# Altium PCB AB32VG1_Prougen_Circuit_V02.PcbDoc (part 3 of 3)
Units mm, origin at the board's own origin, x right, y up, seen from the top; angles counter-clockwise.
Board outline 90.13 x 60.13 mm, 4 copper layers (Top Layer, GND, POWER, Bottom Layer); 102 components, 91 nets, 357 pads, 386 vias.
Unrouted connection lines stored in the file: 1.
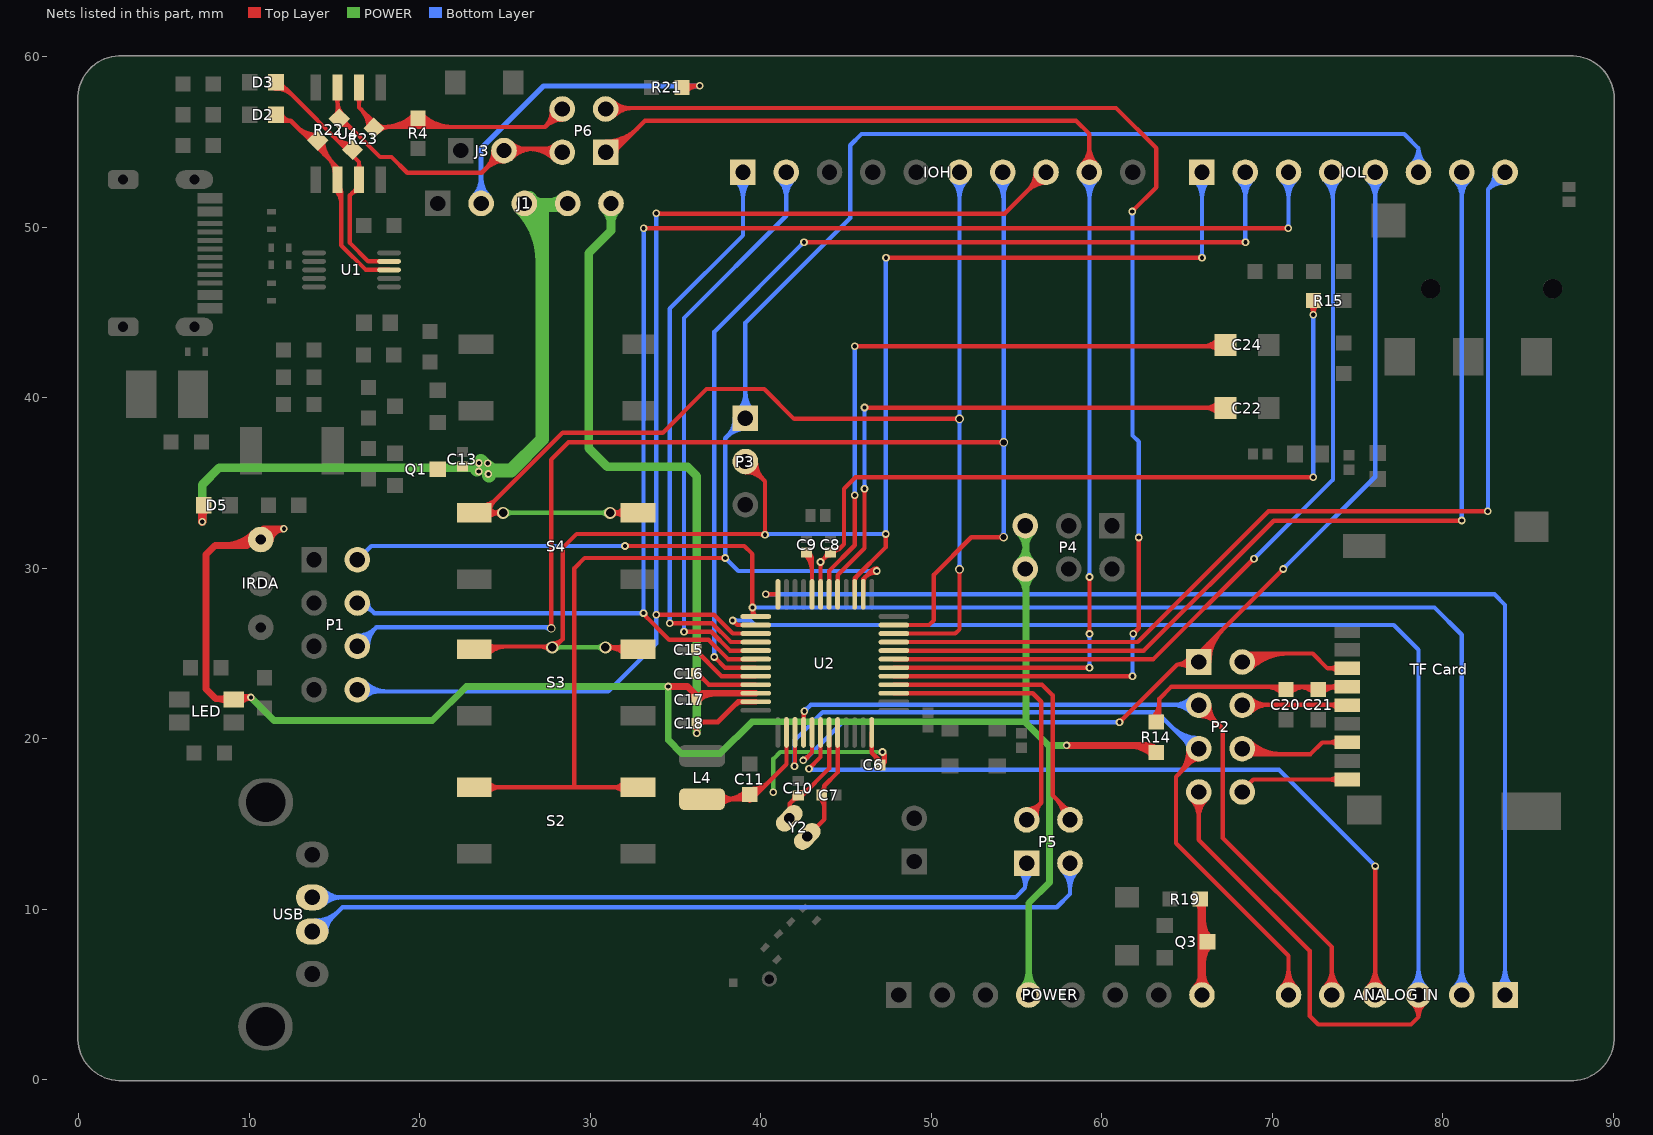
[diagram p5: the nets of this part, all layers, seen from the top]

## Via types
v1: diameter 0.45, hole 0.25, Top Layer to Bottom Layer, tented both sides, 359 vias
v2: diameter 0.5, hole 0.3, Top Layer to Bottom Layer, tented both sides, 14 vias
v3: diameter 0.508, hole 0.356, Top Layer to Bottom Layer, tented both sides, 7 vias
v4: diameter 0.711, hole 0.508, Top Layer to Bottom Layer, tented both sides, 6 vias

## Nets (pads, with @x,y where several pads share a name; then routed paths per layer and width w, separated by ;. In a path a pad name is that pad's centre, name@x,y a point inside that pad or via, vN(x,y) a via of type N, cw(c..) or ccw(c..) an arc to the next point about the centre after c; other vN are vias at no path point) (continued)
PA1/PWM: IOH.7 P1.6 U2.35 | length 91.1
  Top Layer w0.254: v3@27.621,26.569 ccw(c27.404,26.786) 27.711,26.786 ccw(c28.018,26.786) v3@27.801,26.569 ; v3(27.711,26.479) 27.711,36.374 28.724,37.387 v3(54.254,37.387) ; U2.35@47.81,26.67 49.87,26.67 50.155,26.955 50.155,29.625 52.349,31.819 54.246,31.819 v3@54.26,31.819 ; 53.918,31.819 ccw(c53.918,32.156) v3@54.156,31.918 ; 53.961,31.819 cw(c53.961,31.543) v3@54.156,31.738 ; v3@54.164,37.297 ccw(c53.947,37.08) 53.947,37.387 ccw(c53.947,37.694) v3@54.164,37.477
  Bottom Layer w0.254: P1.6@16.34,25.42 17.454,26.534 27.656,26.534 v3(27.711,26.479) ; P1.6@16.34,25.789 ccw(c16.34,26.68) 16.97,26.05 ccw(c17.6,25.42) P1.6@16.709,25.42 ; P1.6@16.34,26.043 ccw(c16.34,27.547) 17.404,26.484 ccw(c18.467,25.42) P1.6@16.963,25.42 ; 27.272,26.534 cw(c27.272,26.04) v3@27.621,26.389 ; IOH.7@53.755,52.789 cw(c52.571,51.605) 54.246,51.605 ; IOH.7@53.935,52.969 cw(c53.184,52.218) 54.246,52.218 ; v3@54.156,31.918 ccw(c53.939,32.135) 54.246,32.135 ccw(c54.553,32.135) v3@54.336,31.918 ; v3@54.164,37.297 cw(c53.967,37.1) 54.246,37.1 ; v3@54.164,37.477 ccw(c53.967,37.674) 54.246,37.674 ; v3(54.246,31.828) 54.246,37.387 IOH.7@54.246,53.23 ; 54.246,37.061 cw(c54.58,37.061) v3@54.344,37.297 ; 54.246,37.713 ccw(c54.58,37.713) v3@54.344,37.477 ; 54.246,51.847 cw(c55.579,51.847) IOH.7@54.637,52.789 ; 54.246,52.46 cw(c54.966,52.46) IOH.7@54.457,52.969
PA2: IOH.6 S4.1 U2.34 | length 86.8
  Top Layer w0.254: S4.1@23.2,33.25 S4.1@23.681,33.25 ; S4.1@23.644,33.213 S4.1@23.681,33.25 ; S4.1@23.645,33.695 ccw(c23.645,34.856) 24.466,34.035 ; S4.1@23.959,32.936 cw(c24.718,32.177) 24.718,33.25 cw(c24.718,34.323) S4.1@23.959,33.564 ; S4.1@24.089,33.25 cw(c25.074,33.25) 24.377,33.946 ; v4@24.731,33.089 ccw(c24.341,32.698) 24.341,33.25 ccw(c24.341,33.802) v4@24.731,33.412 ; v4(24.893,33.25) S4.1@23.681,33.25 ; v4(31.164,33.25) S4.1@32.8,33.25 ; v4@31.325,33.089 cw(c31.716,32.698) 31.716,33.25 cw(c31.716,33.802) v4@31.325,33.412 ; S4.1@32.041,32.936 ccw(c31.282,32.177) 31.282,33.25 ccw(c31.282,34.323) S4.1@32.041,33.564 ; U2.34@47.81,26.17 51.414,26.17 51.658,26.414 v3(51.658,29.939) ; v3@51.568,29.849 cw(c51.351,29.632) 51.658,29.632 cw(c51.965,29.632) v3@51.748,29.849 ; v3@51.568,38.671 ccw(c51.351,38.454) 51.351,38.761 ccw(c51.351,39.068) v3@51.568,38.851 ; v3(51.658,38.761) 41.958,38.761 40.209,40.51 36.822,40.51 34.259,37.947 28.378,37.947 S4.1@23.681,33.25
  POWER w0.254: v4(24.893,33.25) v4(31.164,33.25) ; v4@25.054,33.089 cw(c25.445,32.698) 25.445,33.25 cw(c25.445,33.802) v4@25.054,33.412 ; v4@31.002,33.089 ccw(c30.612,32.698) 30.612,33.25 ccw(c30.612,33.802) v4@31.002,33.412
  Bottom Layer w0.254: IOH.6@51.215,52.789 cw(c50.147,51.721) 51.658,51.721 ; IOH.6@51.395,52.969 cw(c50.76,52.334) 51.658,52.334 ; v3@51.568,30.029 ccw(c51.351,30.246) 51.658,30.246 ccw(c51.965,30.246) v3@51.748,30.029 ; v3@51.568,38.671 cw(c51.351,38.454) 51.658,38.454 cw(c51.965,38.454) v3@51.748,38.671 ; v3@51.568,38.851 ccw(c51.351,39.068) 51.658,39.068 ccw(c51.965,39.068) v3@51.748,38.851 ; IOH.6@51.656,53.23 51.658,53.228 v3(51.658,38.761) v3(51.658,29.939) ; 51.658,51.731 cw(c53.155,51.731) IOH.6@52.097,52.789 ; 51.658,52.344 cw(c52.542,52.344) IOH.6@51.917,52.969
PA3/UART-RX1: IOL.8 U2.33 | length 62.2
  Top Layer w0.254: U2.33@47.81,25.67 62.11,25.67 69.78,33.34 82.65,33.34 v1@82.71,33.34 ; 82.389,33.34 ccw(c82.389,33.611) v1@82.581,33.419
  Bottom Layer w0.254: v1@82.581,33.419 ccw(c82.389,33.611) 82.66,33.611 ; v1@82.66,33.35 82.66,52.23 ; IOL.8@83.038,53.202 cw(c81.745,53.145) 82.66,52.23 ; IOL.8@83.291,53.214 cw(c82.526,53.179) 83.068,52.638 cw(c83.609,52.096) IOL.8@83.644,52.861 ; IOL.8@83.632,52.608 ccw(c83.575,51.315) 82.66,52.23 ; IOL.8@83.66,53.23 82.66,52.23
  other v1: 82.65,33.35
PA4/UART-TX1: IOL.7 U2.32 | length 61.2
  Top Layer w0.254: U2.32@47.81,25.17 62.47,25.17 70.09,32.79 v1@81.1,32.79 ; 80.859,32.79 ccw(c80.859,33.061) v1@81.051,32.869
  Bottom Layer w0.254: IOL.7@80.679,52.789 cw(c79.616,51.726) 81.12,51.726 cw(c82.624,51.726) IOL.7@81.561,52.789 ; IOL.7@80.859,52.969 cw(c80.229,52.339) 81.12,52.339 cw(c82.011,52.339) IOL.7@81.381,52.969 ; v1@81.051,32.869 ccw(c80.883,33.037) 81.12,33.037 ccw(c81.357,33.037) v1@81.189,32.869 ; v1(81.12,32.8) IOL.7@81.12,53.23
PA5: IOL.4 U2.31 | length 52.1
  Top Layer w0.254: U2.31@47.81,24.67 63.03,24.67 v1@68.915,30.555 ; 68.746,30.386 cw(c68.93,30.201) v1@68.93,30.462
  Bottom Layer w0.254: v1(68.93,30.56) 73.57,35.2 IOL.4@73.57,53.16 ; v1@68.93,30.658 ccw(c68.93,30.895) 69.097,30.727 ccw(c69.265,30.56) v1@69.028,30.56 ; IOL.4@73.059,52.789 cw(c71.827,51.557) 73.57,51.557 ; IOL.4@73.239,52.969 cw(c72.44,52.17) 73.57,52.17 ; IOL.4@73.5,53.23 IOL.4@73.57,53.16 ; 73.57,51.895 cw(c74.835,51.895) IOL.4@73.941,52.789 ; IOL.4@73.57,53.23 IOL.4@73.57,53.16
PA6/PWM: IOH.9 P6.1 U2.30 | length 86.9
  Top Layer w0.254: P6.1@30.9,54.515 ccw(c30.9,55.901) 31.88,54.921 ; P6.1@30.9,54.769 ccw(c30.9,56.768) 32.313,55.354 ; P6.1@30.9,55.023 ccw(c30.9,57.635) 32.747,55.788 ; P6.1@31.115,54.156 31.129,54.17 33.209,56.25 58.49,56.25 59.276,55.464 IOH.9@59.276,53.23 ; P6.1@31.523,54.4 cw(c31.919,54.4) P6.1@31.639,54.68 ; U2.30@47.81,24.17 v1(59.28,24.17) ; IOH.9@58.835,53.671 ccw(c57.772,54.734) 59.276,54.734 ccw(c60.78,54.734) IOH.9@59.717,53.671 ; IOH.9@59.015,53.491 ccw(c58.385,54.121) 59.276,54.121 ccw(c60.167,54.121) IOH.9@59.537,53.491 ; v1@59.211,24.101 ccw(c59.043,23.933) 59.043,24.17 ccw(c59.043,24.407) v1@59.211,24.239 ; v1@59.211,26.219 ccw(c59.043,26.387) 59.28,26.387 ccw(c59.517,26.387) v1@59.349,26.219 ; v1@59.211,29.421 cw(c59.043,29.253) 59.28,29.253 cw(c59.517,29.253) v1@59.349,29.421 ; v1(59.28,26.15) v1(59.28,29.49)
  Bottom Layer w0.254: IOH.9@58.835,52.789 cw(c57.762,51.716) 59.28,51.716 ; IOH.9@59.015,52.969 cw(c58.376,52.33) 59.28,52.33 ; v1@59.211,24.239 ccw(c59.043,24.407) 59.28,24.407 ccw(c59.517,24.407) v1@59.349,24.239 ; v1@59.211,26.081 cw(c59.043,25.913) 59.28,25.913 cw(c59.517,25.913) v1@59.349,26.081 ; v1@59.211,29.559 ccw(c59.043,29.727) 59.28,29.727 ccw(c59.517,29.727) v1@59.349,29.559 ; IOH.9@59.276,53.23 59.28,53.226 v1(59.28,29.49) ; v1(59.28,24.17) v1(59.28,26.15) ; 59.28,51.736 cw(c60.77,51.736) IOH.9@59.717,52.789 ; 59.28,52.349 cw(c60.157,52.349) IOH.9@59.537,52.969
PA7: P6.3 U2.29 | length 85
  Top Layer w0.254: P6.3@31.087,57 60.84,57 63.206,54.634 63.206,52.349 v1(61.784,50.927) ; P6.3@31.161,56.679 cw(c31.936,55.904) 31.936,57 ; P6.3@31.341,56.499 cw(c32.549,55.291) 32.549,57 ; P6.3@31.341,57.381 ccw(c32.259,58.299) 32.259,57 ; U2.29@47.81,23.67 v1(61.81,23.67) ; v1@61.741,23.601 ccw(c61.573,23.433) 61.573,23.67 ccw(c61.573,23.907) v1@61.741,23.739 ; v1@61.784,51.025 ccw(c61.784,51.262) 61.951,51.094 ccw(c62.119,50.927) v1@61.882,50.927 ; v1(61.85,26.16) 62.167,26.477 v1(62.167,31.809) ; v1@61.85,26.258 ccw(c61.85,26.495) 62.017,26.327 ccw(c62.185,26.16) v1@61.948,26.16 ; v1@62.098,31.74 cw(c61.93,31.572) 62.167,31.572 cw(c62.404,31.572) v1@62.236,31.74
  Bottom Layer w0.254: v1@61.715,50.858 cw(c61.485,50.628) 61.81,50.628 ; v1@61.741,23.739 ccw(c61.573,23.907) 61.81,23.907 ccw(c62.047,23.907) v1@61.879,23.739 ; v1(61.81,23.67) 61.81,26.12 v1(61.85,26.16) ; 61.81,25.827 cw(c62.183,25.827) v1@61.919,26.091 ; v1@61.816,50.927 61.81,50.921 61.81,37.785 62.167,37.428 v1(62.167,31.809) ; v1@62.098,31.878 ccw(c61.93,32.046) 62.167,32.046 ccw(c62.404,32.046) v1@62.236,31.878
PB0/PWM: IOL.5 P2.1 U2.17 | length 73.3
  Top Layer w0.254: v1(42.495,18.73) v1@42.55,18.73 ; v1@42.495,18.828 ccw(c42.495,19.2) 42.758,18.937 ; v1@42.523,18.702 43.01,19.189 U2.17@43.01,20.37 ; v1(61.04,20.97) 64.43,24.36 ; v1@61.04,21.068 ccw(c61.04,21.305) 61.207,21.137 ccw(c61.375,20.97) v1@61.138,20.97 ; 64.534,24.36 cw(c64.534,23.334) P2.1@65.259,24.059 ; 64.853,24.36 ccw(c64.853,24.951) P2.1@65.374,24.673 ; P2.1@65.15,24.793 cw(c64.43,25.175) 64.43,24.36 ; P2.1@65.815,24.5 cw(c67.324,24.5) 66.257,25.567 ; P2.1@66.069,24.5 cw(c68.191,24.5) 66.691,26.001 ; P2.1@66.323,24.5 cw(c69.058,24.5) 67.124,26.434 ; v1@70.552,29.96 cw(c70.315,29.96) 70.483,29.793 cw(c70.65,29.625) v1@70.65,29.862 ; v1(70.65,29.96) 65.445,24.755 65.05,24.36 64.43,24.36
  Bottom Layer w0.254: v1(42.495,18.73) 42.55,18.73 42.523,18.703 44.791,20.97 v1(61.04,20.97) v1@61.05,20.97 ; v1@42.495,18.828 ccw(c42.495,19.2) 42.758,18.937 ; v1@60.971,20.901 ccw(c60.803,20.733) 60.803,20.97 ccw(c60.803,21.207) v1@60.971,21.039 ; v1@70.689,30.019 76.04,35.37 IOL.5@76.04,53.23 ; v1@70.748,29.96 cw(c71.033,29.96) 70.831,30.161 ; IOL.5@75.599,52.789 cw(c74.536,51.726) 76.04,51.726 cw(c77.544,51.726) IOL.5@76.481,52.789 ; IOL.5@75.779,52.969 cw(c75.149,52.339) 76.04,52.339 cw(c76.931,52.339) IOL.5@76.301,52.969
PB1_ADC3: "ANALOG IN.5" P2.3 U2.16 | length 56.8
  Top Layer w0.254: U2.16@42.51,20.37 42.51,21.57 v1(42.56,21.62) ; U2.16@42.51,21.263 cw(c42.917,21.263) v1@42.629,21.551 ; P2.3@65.69,22 65.715,21.975 67.1,20.59 67.1,14.18 73.5,7.78 73.5,4.97 ; P2.3@65.7,21.337 cw(c65.7,19.761) 66.815,20.875 ; P2.3@65.7,21.591 cw(c65.7,20.628) 66.381,21.309 ; P2.3@66.069,21.96 ccw(c66.887,21.96) 66.309,21.381 ; P2.3@66.323,21.96 ccw(c67.755,21.96) 66.742,20.948 ; 73.059,5.411 ccw(c71.996,6.474) 73.5,6.474 ccw(c75.004,6.474) 73.941,5.411 ; 73.239,5.231 ccw(c72.609,5.861) 73.5,5.861 ccw(c74.391,5.861) 73.761,5.231
  Bottom Layer w0.254: v1(42.56,21.62) 42.94,22 P2.3@65.69,22 ; v1@42.56,21.718 ccw(c42.56,21.955) 42.727,21.787 ccw(c42.895,21.62) v1@42.658,21.62 ; 64.099,22 cw(c64.099,20.359) P2.3@65.259,21.519 ; 64.293,22 ccw(c64.293,23.367) P2.3@65.259,22.401 ; 64.713,22 cw(c64.713,20.973) P2.3@65.439,21.699 ; 64.906,22 ccw(c64.906,22.754) P2.3@65.439,22.221
PB2_ADC4: "ANALOG IN.6" P2.5 U2.15 | length 59.4
  Top Layer w0.254: v1@41.911,18.449 ccw(c41.671,18.689) 42.01,18.689 ; v1(41.98,18.38) 42.01,18.41 U2.15@42.01,20.37 ; 64.515,17.925 ccw(c63.15,19.29) P2.5@65.078,19.388 ; 64.919,18.329 ccw(c63.919,19.329) P2.5@65.331,19.401 ; 65.166,18.576 cw(c65.7,18.041) P2.5@65.7,18.797 ; 65.323,18.733 ccw(c64.688,19.368) P2.5@65.585,19.414 ; P2.5@65.69,19.1 64.36,17.77 64.36,13.872 70.96,7.272 70.96,4.97 ; 70.519,5.411 ccw(c69.456,6.474) 70.96,6.474 ccw(c72.464,6.474) 71.401,5.411 ; 70.699,5.231 ccw(c70.069,5.861) 70.96,5.861 ccw(c71.851,5.861) 71.221,5.231
  Bottom Layer w0.254: v1@41.911,18.449 ccw(c41.743,18.617) 41.98,18.617 ccw(c42.217,18.617) v1@42.049,18.449 ; v1(41.98,18.38) 41.98,19.9 43.63,21.55 63.24,21.55 65.535,19.255 P2.5@65.69,19.1 ; 64.073,20.717 ccw(c65.7,22.344) P2.5@65.7,20.043 ; 64.507,20.283 ccw(c65.7,21.477) P2.5@65.7,19.789 ; 64.87,19.92 cw(c64.37,19.42) P2.5@65.077,19.42 ; 64.94,19.85 ccw(c65.7,20.609) P2.5@65.7,19.535
PE0/PWM: IOL.2 U2.7 | length 65
  Top Layer w0.254: v1@37.28,24.692 cw(c37.28,24.455) 37.447,24.623 cw(c37.615,24.79) v1@37.378,24.79 ; v1(37.28,24.79) 37.9,24.17 U2.7@39.71,24.17 ; v1(42.54,49.13) v1(68.43,49.13) ; v1@42.609,49.061 cw(c42.777,48.893) 42.777,49.13 cw(c42.777,49.367) v1@42.609,49.199 ; v1@68.361,49.061 ccw(c68.193,48.893) 68.193,49.13 ccw(c68.193,49.367) v1@68.361,49.199
  Bottom Layer w0.254: v1@37.211,24.859 ccw(c37.043,25.027) 37.28,25.027 ccw(c37.517,25.027) v1@37.349,24.859 ; v1(37.28,24.79) 37.28,43.87 v1(42.54,49.13) ; v1@42.442,49.13 cw(c42.205,49.13) 42.373,48.963 cw(c42.54,48.795) v1@42.54,49.032 ; IOL.2@67.979,52.789 cw(c66.916,51.726) 68.42,51.726 cw(c69.924,51.726) IOL.2@68.861,52.789 ; IOL.2@68.159,52.969 cw(c67.529,52.339) 68.42,52.339 cw(c69.311,52.339) IOL.2@68.681,52.969 ; v1@68.42,49.13 IOL.2@68.42,53.23 ; 68.42,49.391 ccw(c68.691,49.391) v1@68.499,49.199
PE1/PWM: IOL.3 P1.4 U2.6 | length 95.9
  Top Layer w0.254: v1@33.09,27.34 34.63,25.8 36.95,25.8 38.08,24.67 U2.6@39.71,24.67 ; v1(33.13,49.95) v1(70.94,49.95) ; v1@33.199,49.881 cw(c33.367,49.713) 33.367,49.95 cw(c33.367,50.187) v1@33.199,50.019 ; v1@33.218,27.37 ccw(c33.599,27.37) 33.33,27.1 ; v1@70.871,49.881 ccw(c70.703,49.713) 70.703,49.95 ccw(c70.703,50.187) v1@70.871,50.019
  Bottom Layer w0.254: P1.4@16.4,28.3 16.54,28.16 17.33,27.37 v1(33.12,27.37) v1(33.13,49.95) ; P1.4@16.471,27.615 cw(c16.732,26.928) 17.252,27.448 ; P1.4@16.963,27.96 ccw(c17.501,27.96) 17.121,27.579 ; v1@33.051,27.301 ccw(c32.883,27.133) 32.883,27.37 ccw(c32.883,27.607) 33.051,27.439 ccw(c32.883,27.607) 33.12,27.607 ccw(c33.357,27.606) v1@33.189,27.439 ; v1@33.061,49.881 cw(c32.893,49.714) 33.13,49.713 cw(c33.366,49.713) v1@33.199,49.881 ; IOL.3@70.519,52.789 cw(c69.456,51.726) 70.96,51.726 cw(c72.464,51.726) IOL.3@71.401,52.789 ; IOL.3@70.699,52.969 cw(c70.069,52.339) 70.96,52.339 cw(c71.851,52.339) IOL.3@71.221,52.969 ; v1@70.871,50.019 ccw(c70.655,50.235) 70.96,50.235 ; v1@70.96,49.95 IOL.3@70.96,53.23
PE2_SDA: IOH.2 U2.5 | length 38.5
  Top Layer w0.254: v1@35.47,26.27 35.5,26.27 37.1,26.27 38.2,25.17 U2.5@39.71,25.17 ; v1@35.569,26.349 ccw(c35.761,26.541) 35.761,26.27
  Bottom Layer w0.254: v1@35.431,26.349 ccw(c35.263,26.517) 35.5,26.517 ccw(c35.737,26.517) v1@35.569,26.349 ; v1(35.5,26.28) 35.5,44.68 41.496,50.676 IOH.2@41.496,53.23 ; IOH.2@41.055,52.789 cw(c39.992,51.726) 41.496,51.726 cw(c43,51.726) IOH.2@41.937,52.789 ; IOH.2@41.235,52.969 cw(c40.605,52.339) 41.496,52.339 cw(c42.387,52.339) IOH.2@41.757,52.969
PE3_CLK: IOH.1 U2.4 | length 38.2
  Top Layer w0.254: v1(34.66,26.78) 37.14,26.78 38.25,25.67 U2.4@39.71,25.67 ; v1@34.729,26.711 cw(c34.897,26.543) 34.897,26.78 cw(c34.897,27.017) v1@34.729,26.849
  Bottom Layer w0.254: v1@34.591,26.849 ccw(c34.423,27.017) 34.66,27.017 ccw(c34.897,27.017) v1@34.729,26.849 ; v1(34.66,26.78) 34.66,45.23 38.956,49.526 IOH.1@38.956,53.23 ; IOH.1@38.515,52.789 cw(c37.452,51.726) 38.956,51.726 cw(c40.46,51.726) IOH.1@39.397,52.789 ; IOH.1@38.695,52.969 cw(c38.065,52.339) 38.956,52.339 cw(c39.847,52.339) IOH.1@39.217,52.969
PE4/PWM: IOH.8 P1.8 U2.3 | length 83
  Top Layer w0.254: v1(33.87,27.28) 37.245,27.28 38.355,26.17 U2.3@39.71,26.17 ; v1@33.939,27.211 cw(c34.107,27.043) 34.107,27.28 cw(c34.107,27.517) v1@33.939,27.349 ; v1@33.94,50.8 54.306,50.8 IOH.8@56.736,53.23 ; v1@33.939,50.889 ccw(c34.155,51.105) 34.155,50.8 ; IOH.8@56.113,53.23 cw(c54.609,53.23) 55.672,52.166 cw(c56.736,51.103) IOH.8@56.736,52.607 ; IOH.8@56.367,53.23 cw(c55.476,53.23) 56.106,52.6 cw(c56.736,51.97) IOH.8@56.736,52.861
  Bottom Layer w0.254: P1.8@16.25,22.77 16.34,22.77 31.055,22.77 33.87,25.585 v1(33.87,27.28) v1(33.87,50.82) ; P1.8@16.601,23.141 ccw(c17.496,24.036) 17.496,22.77 ; P1.8@16.781,22.439 cw(c17.578,21.642) 17.578,22.77 ; P1.8@16.781,23.321 ccw(c18.11,24.65) 18.11,22.77 ; v1@33.801,27.211 cw(c33.633,27.043) 33.87,27.043 cw(c34.107,27.043) v1@33.939,27.211 ; v1@33.801,27.349 ccw(c33.633,27.517) 33.87,27.517 ccw(c34.107,27.517) v1@33.939,27.349 ; v1@33.801,50.751 cw(c33.633,50.583) 33.87,50.583 cw(c34.107,50.583) v1@33.939,50.751
PE5_ADC7: "ANALOG IN.3" P2.7 U2.2 | length 97
  Top Layer w0.254: v1@38.35,26.842 cw(c38.35,26.605) 38.517,26.773 cw(c38.685,26.94) v1@38.448,26.94 ; v1(38.35,26.94) 38.62,26.67 U2.2@39.71,26.67 ; P2.7@65.259,16.439 cw(c64.22,15.4) 65.69,15.4 ; P2.7@65.439,16.619 cw(c64.833,16.013) 65.69,16.013 ; 65.69,15.352 cw(c67.228,15.352) P2.7@66.141,16.439 ; 65.69,15.965 cw(c66.615,15.965) P2.7@65.961,16.619 ; 65.69,16.1 65.69,14.066 72.2,7.556 72.2,3.74 72.7,3.24 78.14,3.24 78.58,3.68 ; 78.193,4.482 cw(c77.556,3.68) 78.58,3.68 ; 78.351,4.681 cw(c77.974,4.206) 78.58,4.206 cw(c79.186,4.206) 78.809,4.681 ; 78.58,4.97 78.58,3.68 ; 78.967,4.482 ccw(c79.604,3.68) 78.58,3.68
  Bottom Layer w0.254: v1(38.35,26.94) 39.4,26.94 39.67,26.67 77.13,26.67 78.58,25.22 78.58,4.97 ; v1@38.419,26.871 cw(c38.587,26.703) 38.587,26.94 cw(c38.587,27.177) v1@38.419,27.009 ; 78.139,5.411 ccw(c77.076,6.474) 78.58,6.474 ccw(c80.084,6.474) 79.021,5.411 ; 78.319,5.231 ccw(c77.689,5.861) 78.58,5.861 ccw(c79.471,5.861) 78.841,5.231
PE6_ADC8: "ANALOG IN.2" P1.2 U2.1 | length 97.4
  Top Layer w0.254: v1(32.04,31.31) 39.03,31.31 39.51,30.83 39.51,27.7 v1(39.52,27.7) 39.52,27.24 39.45,27.17 U2.1@39.71,27.17 U2.1@40.05,27.17 ; v1@32.109,31.241 cw(c32.277,31.073) 32.277,31.31 cw(c32.277,31.547) v1@32.109,31.379 ; v1@39.451,27.631 cw(c39.283,27.463) 39.52,27.463 cw(c39.757,27.463) v1@39.589,27.631 ; 39.51,27.961 ccw(c39.781,27.961) v1@39.589,27.769 ; v1@39.52,27.66 ccw(c40.2,27.66) U2.1@39.719,27.179
  Bottom Layer w0.254: P1.2@16.34,30.5 17.15,31.31 v1(32.04,31.31) ; v1@31.971,31.241 ccw(c31.803,31.073) 31.803,31.31 ccw(c31.803,31.547) v1@31.971,31.379 ; v1(39.52,27.7) 79.52,27.7 81.12,26.1 81.12,4.97 ; v1@39.589,27.631 cw(c39.757,27.463) 39.757,27.7 cw(c39.757,27.937) v1@39.589,27.769 ; 80.679,5.411 ccw(c79.616,6.474) 81.12,6.474 ccw(c82.624,6.474) 81.561,5.411 ; 80.859,5.231 ccw(c80.229,5.861) 81.12,5.861 ccw(c82.011,5.861) 81.381,5.231
PE7_ADC9: "ANALOG IN.1" U2.48 | length 71.7
  Top Layer w0.254: v1(40.3,28.47) U2.48@41.01,28.47 ; v1@40.369,28.401 cw(c40.537,28.233) 40.537,28.47 cw(c40.537,28.707) v1@40.369,28.539
  Bottom Layer w0.254: v1(40.3,28.47) 83.04,28.47 83.66,27.85 83.66,4.97 ; v1@40.369,28.401 cw(c40.537,28.233) 40.537,28.47 cw(c40.537,28.707) v1@40.369,28.539 ; 83.219,5.411 ccw(c82.156,6.474) 83.66,6.474 ccw(c85.164,6.474) 84.101,5.411 ; 83.399,5.231 ccw(c82.769,5.861) 83.66,5.861 ccw(c84.551,5.861) 83.921,5.231
PF0: IOL.1 P3.2 S3.1 U2.39 | length 104.2
  Top Layer w0.254: S3.1@23.203,25.411 27.77,25.411 27.955,25.411 28.38,25.836 ; S3.1@23.779,25.115 cw(c24.493,24.402) 24.493,25.411 ; S3.1@23.959,24.936 cw(c25.106,23.788) 25.106,25.411 ; S3.1@23.959,25.564 ccw(c24.329,25.935) 24.329,25.411 ; 27.093,25.411 cw(c27.093,24.682) v4@27.608,25.197 ; 27.344,25.411 ccw(c27.344,25.785) v4@27.608,25.521 ; v4@27.772,25.587 ccw(c27.78,26.436) 28.38,25.836 ; v4(30.887,25.359) 32.691,25.359 S3.1@32.8,25.25 ; v4@31.019,25.359 cw(c31.019,23.914) S3.1@32.041,24.936 ; v4@31.049,25.197 cw(c31.439,24.807) 31.439,25.359 cw(c31.439,25.911) v4@31.049,25.521 ; 31.545,25.359 ccw(c31.545,26.06) S3.1@32.041,25.564 ; 31.633,25.359 cw(c31.633,24.527) S3.1@32.221,25.115 ; P3.2@39.1,35.637 cw(c39.1,34.133) 40.164,35.196 cw(c41.227,36.26) P3.2@39.723,36.26 ; P3.2@39.1,35.891 cw(c39.1,35) 39.73,35.63 cw(c40.36,36.26) P3.2@39.469,36.26 ; P3.2@39.1,36.26 40.25,35.11 v1@40.25,32.01 ; 39.893,32.01 cw(c39.893,31.603) v1@40.181,31.891 ; v1@40.181,32.029 ccw(c40.013,32.197) 40.25,32.197 ccw(c40.487,32.197) v1@40.319,32.029 ; v1(40.25,31.96) v1@40.25,32.01 ; U2.39@45.51,28.47 45.51,29.411 47.34,31.241 v1(47.34,32.01) ; U2.39@45.523,29.23 cw(c45.992,29.23) 45.66,29.561 ; v1@47.271,31.941 cw(c47.103,31.773) 47.34,31.773 cw(c47.577,31.773) v1@47.409,31.941 ; v1(47.35,48.22) v1@65.85,48.22 ; v1@47.419,48.151 cw(c47.587,47.983) 47.587,48.22 cw(c47.587,48.457) v1@47.419,48.289 ; v1@65.811,48.151 ccw(c65.643,47.983) 65.643,48.22 ccw(c65.643,48.457) v1@65.811,48.289 ; 28.38,25.836 28.38,31.19 29.2,32.01 v1@40.25,32.01
  POWER w0.254: v4(27.77,25.359) v4(30.887,25.359) ; v4@27.932,25.197 cw(c28.322,24.807) 28.322,25.359 cw(c28.322,25.911) v4@27.932,25.521 ; v4@30.725,25.197 ccw(c30.335,24.807) 30.335,25.359 ccw(c30.335,25.911) v4@30.725,25.521
  Bottom Layer w0.254: v1@40.25,32 40.26,32.01 v1(47.34,32.01) v1@47.34,48.22 ; v1@40.319,31.891 cw(c40.607,31.603) 40.607,32.01 ; v1@47.271,31.941 ccw(c47.103,31.773) 47.103,32.01 ccw(c47.103,32.247) 47.271,32.079 ccw(c47.103,32.247) 47.34,32.247 ccw(c47.577,32.247) v1@47.409,32.079 ; 47.34,47.959 cw(c47.611,47.959) v1@47.419,48.151 ; IOL.1@65.439,52.789 cw(c64.376,51.726) 65.88,51.726 cw(c67.384,51.726) IOL.1@66.321,52.789 ; IOL.1@65.619,52.969 cw(c64.989,52.339) 65.88,52.339 cw(c66.771,52.339) IOL.1@66.141,52.969 ; v1@65.811,48.289 ccw(c65.643,48.457) 65.88,48.457 ccw(c66.117,48.457) v1@65.949,48.289 ; v1(65.88,48.22) IOL.1@65.88,53.23
PF1: IOL.6 P3.1 S2.1 U2.38 | length 123.2
  Top Layer w0.254: S2.1@23.2,17.15 29.113,17.15 ; S2.1@23.959,16.836 cw(c24.718,16.077) 24.718,17.15 cw(c24.718,18.223) S2.1@23.959,17.464 ; S2.1@32.041,16.836 ccw(c31.282,16.077) 31.282,17.15 ccw(c31.282,18.223) S2.1@32.041,17.464 ; S2.1@32.8,17.15 29.113,17.15 ; v1@37.851,30.531 ccw(c37.683,30.363) 37.683,30.6 ccw(c37.683,30.837) v1@37.851,30.669 ; v1(37.92,30.6) 29.67,30.6 29.07,30 29.07,17.193 29.113,17.15 ; U2.38@46.01,28.47 46.01,29.372 46.478,29.84 v1(46.8,29.84) ; U2.38@46.023,29.23 cw(c46.398,29.23) 46.133,29.495 ; 46.082,29.445 cw(c46.8,28.727) v1@46.8,29.742 ; 46.316,29.679 cw(c46.588,29.407) v1@46.757,29.752 ; 46.516,29.878 cw(c46.8,29.594) v1@46.8,29.996 ; v1@46.731,29.771 ccw(c46.563,29.603) 46.563,29.84 ccw(c46.563,30.077) v1@46.731,29.909
  Bottom Layer w0.254: v1@37.851,30.669 ccw(c37.683,30.837) 37.92,30.837 ccw(c38.157,30.837) v1@37.989,30.669 ; v1@37.92,30.502 cw(c37.92,30.265) 38.087,30.433 cw(c38.255,30.6) v1@38.018,30.6 ; P3.1@38.477,38.8 cw(c36.973,38.8) 38.036,37.736 cw(c39.1,36.673) P3.1@39.1,38.177 ; P3.1@38.659,39.241 ccw(c37.596,40.304) 39.1,40.304 ccw(c40.604,40.304) P3.1@39.541,39.241 ; P3.1@38.731,38.8 cw(c37.84,38.8) 38.47,38.17 cw(c39.1,37.54) P3.1@39.1,38.431 ; P3.1@38.839,39.061 ccw(c38.209,39.691) 39.1,39.691 ccw(c39.991,39.691) P3.1@39.361,39.061 ; v1@46.731,29.771 ccw(c46.563,29.603) 46.563,29.84 ccw(c46.563,30.077) v1@46.731,29.909 ; v1(46.8,29.84) 38.68,29.84 v1(37.92,30.6) 37.92,37.62 P3.1@39.1,38.8 39.1,44.4 45.25,50.55 45.25,54.81 45.91,55.47 77.74,55.47 78.58,54.63 ; IOL.6@78.163,53.693 ccw(c77.319,54.63) 78.58,54.63 ; IOL.6@78.333,53.504 ccw(c77.833,54.059) 78.58,54.059 ccw(c79.327,54.059) IOL.6@78.827,53.504 ; IOL.6@78.58,53.23 78.58,54.63 ; IOL.6@78.997,53.693 cw(c79.841,54.63) 78.58,54.63
PWKEY: "ANALOG IN.4" U2.18 | length 50.8
  Top Layer w0.254: v1(42.827,18.245) 43.51,18.928 U2.18@43.51,20.37 ; v1@42.827,18.343 ccw(c42.827,18.58) 42.994,18.412 ccw(c43.162,18.245) v1@42.925,18.245 ; 75.599,5.411 ccw(c74.536,6.474) 76.04,6.474 ccw(c77.544,6.474) 76.481,5.411 ; 75.779,5.231 ccw(c75.149,5.861) 76.04,5.861 ccw(c76.931,5.861) 76.301,5.231 ; v1@75.971,12.461 cw(c75.803,12.293) 76.04,12.293 cw(c76.277,12.293) v1@76.109,12.461 ; 76.04,4.97 v1(76.04,12.53)
  Bottom Layer w0.254: v1(42.827,18.245) 42.955,18.245 43.02,18.18 70.402,18.18 76.046,12.536 v1@76.15,12.432 ; v1@42.896,18.314 ccw(c43.221,18.639) 43.221,18.18 ; 75.864,12.718 cw(c75.676,12.53) v1@75.942,12.53
RT32KI: C7.1 U2.20 Y2.2 | length 8.3
  Top Layer w0.254: Y2.2@42.73,14.27 43.73,15.269 C7.1@43.73,16.699 ; Y2.2@42.73,14.732 Y2.2@42.799,14.801 ; C7.1@43.453,16.553 cw(c42.783,15.883) 43.73,15.883 ; C7.1@43.5,16.881 ccw(c43.324,17.247) 43.73,17.247 ; C7.1@43.663,16.776 C7.1@43.73,16.699 ; C7.1@43.741,16.686 C7.1@43.73,16.699 ; U2.20@44.51,20.37 44.51,18.027 43.73,17.247 ; C7.1@43.73,16.699 43.73,16.7 43.73,17.247
RT32KO: C10.1 U2.19 Y2.1 | length 7.7
  Top Layer w0.254: Y2.1@41.707,15.13 41.707,15.33 41.707,16.197 42.193,16.682 42.2,16.682 42.442,16.682 44.01,18.251 U2.19@44.01,20.37 ; 41.873,16.363 ccw(c41.56,16.675) C10.1@42.002,16.675 ; C10.1@41.897,16.387 cw(c42.175,16.109) C10.1@42.175,16.502 ; C10.1@42.225,16.848 ccw(c42.225,17.77) 42.877,17.118
RXD: D3.K R23.1 U1.9 U4.3 | length 19.9
  Top Layer w0.254: D3.K@11.524,58.135 11.57,58.135 12.135,58.135 15.882,54.388 16.44,53.83 U4.3@16.44,52.8 16.44,52.41 15.9,51.87 15.9,49.084 16.984,48 U1.9@18.2,48 ; D3.K@11.57,58.137 cw(c11.57,56.778) 12.531,57.739 ; D3.K@11.57,58.391 cw(c11.57,57.645) 12.097,58.173 ; D3.K@11.679,58.155 cw(c11.857,57.632) 12.247,58.023 ; 14.921,55.349 ccw(c16.055,56.483) R23.1@16.055,54.879 ; 15.355,54.915 ccw(c16.055,55.615) R23.1@16.055,54.625 ; 16,51.97 cw(c16.44,51.529) U4.3@16.44,52.152 ; U4.3@16.318,53.397 ccw(c16.022,53.693) 16.44,53.693 ccw(c16.858,53.693) U4.3@16.562,53.397
SD_CLK: "TF Card.5" P2.4 | length 11
  Top Layer w0.254: P2.4@68.23,22 68.24,22 74.356,22 74.4,21.956 ; P2.4@68.501,21.699 cw(c69.227,20.973) 69.227,22 ; P2.4@68.501,22.221 ccw(c69.034,22.754) 69.034,22 ; P2.4@68.681,21.519 cw(c69.841,20.359) 69.841,22 ; P2.4@68.681,22.401 ccw(c69.647,23.367) 69.647,22 ; 73.285,22 cw(c73.285,21.191) 73.857,21.763 ; 73.497,22 ccw(c73.497,22.509) 73.857,22.149
SD_CMD: "TF Card.3" P2.2 | length 14.8
  Top Layer w0.254: P2.2@68.142,24.598 cw(c69.112,23.628) 69.112,25 ; P2.2@68.23,25 68.24,25 72.38,25 73.252,24.128 74.4,24.128 ; P2.2@68.321,24.419 cw(c69.725,23.015) 69.725,25 ; P2.2@68.501,24.239 cw(c70.338,22.402) 70.338,25 ; P2.2@68.681,24.059 cw(c70.951,21.789) 70.951,25 ; 73.857,23.935 ccw(c73.391,23.469) 73.391,24.128 ccw(c73.391,24.787) 73.857,24.321
SD_DAT: "TF Card.7" P2.6 | length 12.5
  Top Layer w0.254: P2.6@68.23,19.1 68.24,19.1 72.25,19.1 72.934,19.784 74.4,19.784 ; P2.6@68.321,19.501 ccw(c69.29,20.47) 69.29,19.1 ; P2.6@68.501,19.681 ccw(c69.903,21.083) 69.903,19.1 ; P2.6@68.681,18.979 cw(c68.972,18.688) 68.972,19.1 ; P2.6@68.681,19.861 ccw(c70.517,21.697) 70.517,19.1 ; 73.857,19.591 ccw(c73.391,19.125) 73.391,19.784 ccw(c73.391,20.443) 73.857,19.977
SD_DET: "TF Card.9" P2.8 | length 8.1
  Top Layer w0.254: P2.8@67.802,16.528 68.197,16.923 68.886,17.612 74.4,17.612 ; 73.857,17.419 ccw(c73.391,16.953) 73.391,17.612 ccw(c73.391,18.271) 73.857,17.805
SDVDD: "TF Card.4" C20.2 C21.2 R14.2 | length 21.8
  Top Layer w0.254: R14.2@62.975,21.203 ccw(c62.023,22.155) 63.37,22.155 ; R14.2@63.155,21.023 ccw(c62.636,21.542) 63.37,21.542 ; R14.2@63.37,20.74 63.37,20.978 63.37,22.34 64.072,23.042 70.8,23.042 72.7,23.042 74.4,23.042 ; 69.664,23.042 cw(c69.664,21.753) C20.2@70.575,22.664 ; 70.277,23.042 cw(c70.277,22.366) C20.2@70.755,22.844 ; C20.2@70.845,22.844 cw(c71.323,22.366) 71.323,23.042 ; C20.2@71.025,22.664 cw(c71.936,21.753) 71.936,23.042 ; 71.564,23.042 cw(c71.564,21.753) C21.2@72.475,22.664 ; 72.177,23.042 cw(c72.177,22.366) C21.2@72.655,22.844 ; C21.2@72.745,22.844 cw(c73.223,22.366) 73.223,23.042 ; C21.2@72.925,22.664 cw(c73.836,21.753) 73.836,23.042 ; 73.857,22.849 ccw(c73.391,22.383) 73.391,23.042 ccw(c73.391,23.701) 73.857,23.235
TXD: D2.K R22.1 U1.8 U4.2 | length 22.3
  Top Layer w0.254: D2.K@11.57,56.9 D2.K@11.57,56.6 11.57,56.279 11.601,56.248 12.432,56.248 ; D2.K@11.651,56.596 ccw(c12.103,56.715) 12.103,56.248 ; D2.K@11.897,56.661 ccw(c12.432,56.801) 12.432,56.248 ; 12.734,55.946 ccw(c14.02,57.233) R22.1@14.02,55.414 ; 13.167,55.513 ccw(c14.02,56.365) R22.1@14.02,55.16 ; R22.1@14.083,55.096 ccw(c15.289,55.096) 14.437,54.243 ; R22.1@14.337,55.096 ccw(c16.157,55.096) 14.87,53.81 ; 14.708,53.972 cw(c14.012,53.275) U4.2@14.997,53.275 ; U4.2@15.048,52.203 cw(c14.197,51.352) 15.4,51.352 ; U4.2@15.162,52.152 cw(c15.15,51.902) 15.4,51.902 ; U4.2@15.227,52.382 cw(c14.81,51.965) 15.4,51.965 ; U4.2@15.316,52.232 ccw(c15.451,52.146) U4.2@15.337,52.033 ; U1.8@18.2,47.5 16.839,47.5 15.4,48.939 15.4,51.97 15.17,52.2 U4.2@15.17,52.8 15.17,53.51 13.802,54.878 12.432,56.248
UPDATE: P6.4 R4.1 R23.2 U4.6 | length 33
  Top Layer w0.254: U4.6@16.318,57.603 cw(c16.022,57.307) 16.44,57.307 cw(c16.858,57.307) U4.6@16.562,57.603 ; U4.6@16.44,58.2 16.44,57.03 17.482,55.988 17.592,55.878 19.9,55.878 ; 16.531,56.939 cw(c15.41,55.819) R23.2@16.995,55.819 ; 16.964,56.506 cw(c16.278,55.819) R23.2@17.249,55.819 ; R23.2@17.537,55.594 cw(c18.222,54.909) 18.222,55.878 ; R23.2@17.537,56.043 ccw(c17.936,56.442) 17.936,55.878 ; R23.2@17.873,55.878 ccw(c17.873,58.427) R4.1@19.675,56.625 ; 18.486,55.878 ccw(c18.486,57.814) R4.1@19.855,56.445 ; 19.1,55.878 ccw(c19.1,57.2) R4.1@20.035,56.265 ; R4.1@19.586,56.086 ccw(c20.087,56.587) 20.087,55.878 ; 19.713,55.878 ccw(c19.713,56.587) R4.1@20.214,56.086 ; R4.1@19.765,56.265 ccw(c20.7,57.2) 20.7,55.878 ; R4.1@19.945,56.445 ccw(c21.314,57.814) 21.314,55.878 ; R4.1@20.125,56.625 ccw(c21.927,58.427) 21.927,55.878 ; 27.364,55.9 ccw(c26.453,56.811) P6.4@27.738,56.898 ; 27.372,55.908 cw(c28.36,54.919) P6.4@28.36,56.317 ; 27.759,56.295 ccw(c27.194,56.861) P6.4@27.992,56.915 ; 27.805,56.341 cw(c28.36,55.786) P6.4@28.36,56.571 ; P6.4@28.547,57.083 28.382,56.918 27.342,55.878 19.9,55.878 ; 19.9,55.878 ccw(c19.63,55.878) 19.754,56.118 cw(c19.63,55.878) 19.9,55.878 ; 19.9,55.878 cw(c20.17,55.878) 20.046,56.118 ccw(c20.17,55.878) 19.9,55.878
URX0: J3.2 P6.2 R22.2 U4.7 | length 31.9
  Top Layer w0.254: U4.7@15.048,57.603 cw(c14.752,57.307) 15.17,57.307 cw(c15.588,57.307) U4.7@15.292,57.603 ; R22.2@15.053,56.578 ccw(c14.77,56.861) R22.2@15.17,56.861 ; 15.17,57.379 ccw(c16.303,57.379) R22.2@15.502,56.578 ; U4.7@15.17,58.2 15.17,56.623 15.358,56.435 17.673,54.12 18.342,54.12 19.265,53.197 23.637,53.197 J3.2@24.94,54.5 ; R22.2@15.277,56.036 cw(c15.277,54.877) 16.097,55.696 ; R22.2@15.277,56.29 cw(c15.277,55.744) R22.2@15.663,56.13 ; R22.2@15.595,56.353 ccw(c15.969,56.353) 15.704,56.089 ; J3.2@24.317,54.5 cw(c22.813,54.5) 23.876,53.436 cw(c24.94,52.373) J3.2@24.94,53.877 ; J3.2@24.571,54.5 cw(c23.68,54.5) 24.31,53.87 cw(c24.94,53.24) J3.2@24.94,54.131 ; J3.2@25.025,54.6 28.13,54.6 28.345,54.385 P6.2@28.547,54.183 ; J3.2@25.201,54.239 cw(c26.072,53.368) 26.072,54.6 ; J3.2@25.381,54.059 cw(c26.685,52.755) 26.685,54.6 ; J3.2@25.381,54.941 ccw(c26.203,55.763) 26.203,54.6 ; 26.373,54.6 cw(c26.373,52.413) P6.2@27.919,53.959 ; 26.986,54.6 cw(c26.986,53.026) P6.2@28.099,54.139 ; 27.339,54.6 ccw(c27.339,55.421) P6.2@27.919,54.841 ; 27.6,54.6 cw(c27.6,53.64) P6.2@28.279,54.319
USB_DM: P5.1 USB.2 | length 51.3
  Top Layer w0.254: USB.2@13.694,10.698 14.302,10.698 USB.2@14.474,10.87
  Bottom Layer w0.254: USB.2@13.391,10.696 13.694,10.696 54.936,10.696 55.5,11.26 55.5,12.7 P5.1@55.5,12.76 ; USB.2@14.153,10.429 cw(c14.799,9.783) 14.799,10.696 ; USB.2@14.153,10.967 ccw(c14.809,11.623) 14.809,10.696 ; USB.2@14.333,10.249 cw(c15.412,9.17) 15.412,10.696 ; USB.2@14.333,11.147 ccw(c15.422,12.236) 15.422,10.696 ; P5.1@55.159,12.259 cw(c54.337,11.437) 55.5,11.437 ; 55.5,11.257 cw(c56.679,11.257) P5.1@55.973,12.201 ; 55.5,11.764 cw(c56.3,11.764) P5.1@55.821,12.404
USB_DM/PB4: P5.2 U2.27 | length 18.6
  Top Layer w0.254: U2.27@47.81,22.67 55.95,22.67 56.45,22.17 56.45,16.25 ; P5.2@55.5,15.3 55.52,15.32 56.45,16.25 ; P5.2@55.6,15.863 ccw(c55.6,16.981) 56.39,16.19 ; P5.2@55.959,15.326 cw(c56.583,15.475) 56.129,15.929 ; P5.2@56.206,15.385 cw(c57.1,15.599) 56.45,16.25
USB_DP: P5.3 USB.3 | length 54.6
  Bottom Layer w0.254: USB.3@13.694,8.698 14.043,8.698 15.465,10.12 57.365,10.12 58.142,10.897 58.142,12.402 58.29,12.55 P5.3@58.5,12.76 ; USB.3@13.884,9.079 ccw(c13.884,10.383) 14.806,9.461 ; USB.3@13.884,9.333 ccw(c13.884,11.25) 15.239,9.894 ; USB.3@14.519,8.698 cw(c15.668,8.698) 14.856,9.511 ; P5.3@57.699,12.259 cw(c56.631,11.191) 58.142,11.191 ; P5.3@57.879,12.439 cw(c57.244,11.804) 58.142,11.804 ; 58.142,11.201 cw(c59.639,11.201) P5.3@58.581,12.259 ; 58.142,11.814 cw(c59.026,11.814) P5.3@58.401,12.439
USB_DP/PB3: P5.4 U2.28 | length 20.1
  Top Layer w0.254: U2.28@47.81,23.17 56.5,23.17 57.12,22.55 57.12,16.68 58.35,15.45 P5.4@58.5,15.3 ; 57.308,16.492 cw(c56.179,15.364) P5.4@57.772,15.263 ; 57.705,16.095 cw(c56.927,15.317) P5.4@58.025,15.247 ; 57.793,16.007 ccw(c58.14,16.353) P5.4@58.14,15.863
VBAT: C18.1 J1.5 U2.11 | length 60.9
  Top Layer w0.3: C18.1@36.119,20.769 cw(c35.863,20.513) 36.225,20.513 cw(c36.587,20.513) C18.1@36.331,20.769 ; 36.225,20.571 ccw(c36.491,20.571) v1@36.303,20.383 ; C18.1@36.225,20.733 C18.1@36.225,20.9 36.225,20.355 v1(36.25,20.33) ; C18.1@36.243,20.993 37.493,20.993 38.67,22.17 U2.11@39.71,22.17 ; C18.1@36.331,20.819 cw(c36.75,20.4) 36.75,20.993 ; 38.489,21.989 cw(c38.95,21.528) U2.11@38.95,22.18 ; 38.53,22.03 cw(c38.898,21.662) U2.11@38.951,22.18
  POWER w0.3: v1(36.25,20.33) 36.25,35.41
  POWER w0.5: J1.5@30.863,51.046 cw(c30.01,50.193) 31.217,50.193 cw(c32.424,50.193) J1.5@31.571,51.046 ; J1.5@31.217,51.4 31.217,49.796 29.911,48.49 29.911,37.036 30.997,35.95 35.71,35.95 36.25,35.41 v1@36.25,20.367
VBAT': J1.2 R21.2 | length 22
  Top Layer w0.3: R21.2@35.378,58.2 35.473,58.295 v1(36.419,58.295) ; R21.2@35.586,57.992 cw(c36.318,57.26) v1@36.318,58.295 ; R21.2@35.586,58.408 ccw(c35.86,58.682) 35.86,58.295
  Bottom Layer w0.3: J1.2@23.173,51.824 ccw(c22.148,52.849) 23.597,52.849 ccw(c25.046,52.849) J1.2@24.021,51.824 ; J1.2@23.597,51.4 23.597,54.628 27.264,58.295 v1(36.419,58.295)
VCC3V3: C17.1 IRDA.3 LED.1 P4.5 P4.6 POWER.4 R14.1 U2.10 | length 128.5
  Top Layer w0.254: C17.1@36.175,22.47 C17.1@36.215,22.47 ; C17.1@36.215,22.42 C17.1@36.215,22.47 ; C17.1@36.215,22.554 C17.1@36.215,22.47 ; C17.1@36.41,22.47 36.225,22.47 C17.1@36.215,22.47
  Top Layer w0.4: 8.19,22.35 cw(c8.19,21.515) LED.1@8.781,22.106 ; 8.432,22.35 ccw(c8.432,22.843) LED.1@8.781,22.494 ; 8.495,31.331 ccw(c8.495,33.861) IRDA.3@10.284,32.072 ; LED.1@8.84,22.46 LED.1@8.89,22.51 ; LED.1@9,22.35 8.03,22.35 7.47,22.91 7.47,30.8 8.001,31.331 9.861,31.331 10.443,31.913 10.85,32.32 v1(12.03,32.32) ccw(c12.03,31.501) IRDA.3@11.218,31.61 ; LED.1@9.285,22.485 9.345,22.425 v1(10.095,22.425) ccw(c10.095,21.554) LED.1@9.434,22.121 ; 9.46,31.331 ccw(c9.46,32.896) IRDA.3@10.567,31.789 ; IRDA.3@10.425,31.716 cw(c11.115,31.624) 11.115,32.32 ; IRDA.3@10.822,31.663 cw(c11.573,31.562) 11.573,32.32 ; v1(34.58,23.06) 35.709,23.06 C17.1@36.215,22.554 ; 35.899,22.87 cw(c35.354,22.325) C17.1@36.125,22.325 ; C17.1@36.225,22.425 ccw(c36.225,22.763) C17.1@36.464,22.524 ; C17.1@36.296,22.254 cw(c37.299,21.251) 37.299,22.67 ; C17.1@36.41,22.47 36.61,22.67 U2.10@39.71,22.67 ; v1@57.948,19.61 62.79,19.61 R14.1@63.2,19.2 ; 61.62,19.61 cw(c61.62,17.62) R14.1@63.027,19.027 ; 62.586,19.61 cw(c62.586,18.586) R14.1@63.31,19.31
  POWER w0.4: v1@10.136,22.384 11.457,21.063 20.733,21.063 22.73,23.06 v1(34.58,23.06) 34.58,19.916 35.358,19.138 37.62,19.138 39.474,20.993 55.5,20.993 56.882,19.61 56.939,19.61 ; P4.6@55.131,29.571 cw(c54.113,28.553) 55.553,28.553 ; P4.6@55.131,30.349 ccw(c54.113,31.367) 55.553,31.367 ; P4.5@55.131,32.111 cw(c54.113,31.093) 55.553,31.093 ; P4.5@55.2,32.54 55.38,32.36 55.553,32.187 55.553,29.96 55.553,21.046 ; POWER.4@55.331,5.359 ccw(c54.392,6.298) 55.72,6.298 ccw(c57.048,6.298) POWER.4@56.109,5.359 ; 55.553,28.712 cw(c56.768,28.712) P4.6@55.909,29.571 ; 55.553,31.208 ccw(c56.768,31.208) P4.6@55.909,30.349 ; 55.553,31.252 cw(c56.768,31.252) P4.5@55.909,32.111 ; POWER.4@55.72,4.97 55.72,10.354 56.939,11.573 56.939,19.61 ; v1(57.94,19.61) 56.939,19.61
VCM: C9.1 U2.44 | length 5
  Top Layer w0.254: C9.1@42.593,30.823 cw(c41.585,29.815) 43.01,29.815 ; C9.1@42.69,30.945 43.01,30.625 U2.44@43.01,28.47 ; C9.1@42.715,30.772 cw(c42.715,30.415) C9.1@42.968,30.667 ; C9.1@42.772,31.002 cw(c42.198,30.428) 43.01,30.428 ; C9.1@42.888,30.933 ccw(c43.265,30.905) 42.997,30.638
VDDBKO: C6.2 C11.2 L4.2 U2.14 U2.24 | length 28.5
  Top Layer w0.254: L4.2@36.56,16.45 39.26,16.45 39.36,16.35 39.551,16.541 41.51,18.5 U2.14@41.51,20.37 ; L4.2@37.634,16.091 cw(c38.501,15.224) 38.501,16.45 cw(c38.501,17.676) L4.2@37.634,16.809 ; 37.915,16.45 ccw(c37.915,18.176) C11.2@39.135,16.956 ; 38.528,16.45 ccw(c38.528,17.563) C11.2@39.315,16.776 ; C11.2@39.36,16.795 ccw(c39.36,17.868) 40.119,17.109 ; C11.2@39.36,17.049 ccw(c39.36,18.735) 40.552,17.542 ; U2.24@46.51,20.37 46.51,19.18 47.015,18.675 C6.2@47.015,18.47 47.29,18.745 v1@47.29,19.07 ; 46.592,19.098 cw(c45.99,18.495) C6.2@46.842,18.495 ; C6.2@46.973,18.663 ccw(c46.87,19.07) v1@47.29,19.07 ; C6.2@47.035,18.416 ccw(c46.952,18.744) C6.2@47.29,18.744 ; v1@47.081,19.142 cw(c46.764,18.722) C6.2@47.29,18.722 ; v1(47.14,19.22) v1@47.29,19.07
  POWER w0.254: v1@40.671,16.929 ccw(c40.503,17.097) 40.74,17.097 ccw(c40.977,17.097) v1@40.809,16.929 ; v1(40.74,16.86) 40.74,18.82 41.14,19.22 v1(47.14,19.22) ; v1@47.071,19.151 ccw(c46.903,18.983) 46.903,19.22 ccw(c46.903,19.457) v1@47.071,19.289
VDDCORE: C15.1 U2.8 | length 4.9
  Top Layer w0.254: C15.1@36.15,25.22 36.183,25.188 37.7,23.67 U2.8@39.71,23.67 ; C15.1@36.215,25.022 cw(c36.215,24.701) C15.1@36.442,24.928 ; C15.1@36.215,25.175 C15.1@36.215,25.22 ; C15.1@36.388,25.195 ccw(c36.902,25.195) 36.539,24.831
VDDDAC: C8.1 R15.2 U2.43 | length 49.5
  Top Layer w0.254: v1@43.441,30.296 cw(c43.273,30.128) 43.51,30.128 cw(c43.747,30.128) v1@43.579,30.296 ; U2.43@43.51,28.47 v1(43.51,30.365) C8.1@44.09,30.945 44.255,31.11 44.58,31.11 ; v1@43.51,30.463 ccw(c43.51,30.7) 43.677,30.532 ccw(c43.845,30.365) v1@43.608,30.365 ; 43.752,30.607 ccw(c43.414,30.945) C8.1@43.892,30.945 ; C8.1@43.812,30.667 cw(c44.065,30.415) C8.1@44.065,30.772 ; C8.1@44.28,30.892 cw(c44.58,30.794) 44.58,31.11 ; R15.2@72.197,45.475 cw(c71.655,44.933) 72.422,44.933 cw(c73.189,44.933) R15.2@72.647,45.475 ; v1@72.341,35.271 ccw(c72.173,35.103) 72.173,35.34 ccw(c72.173,35.577) v1@72.341,35.409 ; v1@72.341,44.939 ccw(c72.144,45.136) 72.422,45.136 ; v1(72.41,35.34) 45.56,35.34 44.88,34.66 44.88,31.41 44.58,31.11 ; v1(72.41,44.87) 72.422,44.882 R15.2@72.422,45.7
  Bottom Layer w0.254: v1@72.341,35.409 ccw(c72.173,35.577) 72.41,35.577 ccw(c72.647,35.577) v1@72.479,35.409 ; v1@72.341,44.801 cw(c72.173,44.633) 72.41,44.633 cw(c72.647,44.633) v1@72.479,44.801 ; v1(72.41,35.34) v1(72.41,44.87)
VIN: C13.1 D5.A J1.3 J1.4 Q1.3 | length 68.2
  Top Layer w0.5: v1(7.24,32.721) 7.24,33.61 D5.A@7.33,33.7 ; v1@7.24,32.939 cw(c8.066,32.939) D5.A@7.482,33.523
  POWER w0.254: 27.182,37.568 27.4,37.786 27.4,47.2
  POWER w0.5: v1(7.24,32.721) 7.24,34.903 8.242,35.905 23.463,35.905 23.468,35.905 23.515,35.905 23.463,35.853 v1(23.463,35.673) ; 22.886,35.905 ccw(c22.886,36.753) 23.486,36.153 cw(c22.886,36.753) 22.886,35.905 ; 22.963,35.905 cw(c22.963,35.173) 23.481,35.691 ccw(c22.963,35.173) 22.963,35.905
  POWER w0.8: v1@23.344,36.047 ccw(c23.553,36.256) 23.553,35.961 ; v1@23.866,36.042 ccw(c24.603,36.779) 24.603,35.737 ; v1@24.025,35.737 25.351,35.737 27.182,37.568 27.182,51.306 ; v1@24.025,35.738 24.004,35.92 23.999,35.961 23.99,35.961 23.538,35.961 cw(c23.538,35.189) v1@24.168,35.635 ; J1.3@25.89,51.153 cw(c22.769,48.032) 27.182,48.032 ; J1.3@26.137,51.4 26.231,51.306 27.182,51.306 ; J1.3@26.384,51.647 ccw(c27.209,52.472) 27.209,51.306 ; J1.3@26.455,51.718 cw(c24.701,49.964) 27.182,49.964 ; 27.605,51.306 ccw(c27.605,52.472) J1.4@28.43,51.647 ; J1.4@28.629,51.659 28.524,51.554 28.276,51.306 27.182,51.306 ; v1@23.339,35.797 cw(c23.735,35.401) 23.735,35.961 ; v1@23.339,35.797 cw(c23.735,35.401) 23.735,35.961 ; v1@23.339,35.797 cw(c23.735,35.401) 23.735,35.961 ; 27.182,51.306 cw(c27.182,52.408) 26.389,51.643 ccw(c27.182,52.408) 27.182,51.306 ; v1@23.577,36.308 cw(c22.77,35.292) 24.059,35.44 ccw(c22.77,35.292) v1@23.577,36.308
  other v1: 24.025,35.534 23.468,36.171 23.99,36.166
VIN_+5V: POWER.8 Q3.3 R19.2 | length 10.3
  Top Layer w0.5: POWER.8@65.526,5.324 ccw(c64.673,6.177) 65.88,6.177 ccw(c67.087,6.177) POWER.8@66.234,5.324 ; R19.2@65.64,10.462 cw(c65.062,9.884) 65.88,9.884 ; POWER.8@65.88,4.97 65.88,8.1 R19.2@65.88,10.44 ; 65.88,6.905 cw(c67.37,6.905) Q3.3@66.316,7.959 ; 65.88,9.295 ccw(c67.37,9.295) Q3.3@66.316,8.241
VOUTLP: C24.1 U2.42 | length 41
  Top Layer w0.254: U2.42@44.01,28.47 44.01,29.84 45.52,31.35 v1(45.52,34.28) ; v1@45.451,34.211 cw(c45.283,34.043) 45.52,34.043 cw(c45.757,34.043) v1@45.589,34.211 ; v1(45.52,43.02) C24.1@67.26,43.02 ; v1@45.589,42.951 cw(c45.757,42.783) 45.757,43.02 cw(c45.757,43.257) v1@45.589,43.089 ; 65.84,43.02 ccw(c65.84,44.52) C24.1@66.901,43.459 ; 66.227,43.02 cw(c66.227,42.067) C24.1@66.901,42.741 ; 66.454,43.02 ccw(c66.454,43.906) C24.1@67.08,43.28
  Bottom Layer w0.254: v1@45.451,34.349 ccw(c45.283,34.517) 45.52,34.517 ccw(c45.757,34.517) v1@45.589,34.349 ; v1@45.451,42.951 cw(c45.283,42.783) 45.52,42.783 cw(c45.757,42.783) v1@45.589,42.951 ; v1(45.52,34.28) v1(45.52,43.02)
VOUTRP: C22.1 U2.41 | length 36.6
  Top Layer w0.254: U2.41@44.51,28.47 44.51,29.59 46.09,31.17 v1@46.09,34.64 ; v1@46.021,34.588 cw(c45.853,34.42) 46.09,34.42 cw(c46.327,34.42) v1@46.159,34.588 ; v1@46.09,39.42 C22.1@67.26,39.42 ; v1@46.159,39.499 ccw(c46.351,39.691) 46.351,39.42 ; 65.985,39.42 cw(c65.985,38.125) C22.1@66.901,39.041 ; 66.082,39.42 ccw(c66.082,40.578) C22.1@66.901,39.759 ; 66.599,39.42 cw(c66.599,38.739) C22.1@67.08,39.22
  Bottom Layer w0.254: v1@46.021,34.726 ccw(c45.853,34.894) 46.09,34.894 ccw(c46.327,34.894) v1@46.159,34.726 ; v1@46.021,39.361 cw(c45.853,39.193) 46.09,39.193 cw(c46.327,39.193) v1@46.159,39.361 ; v1(46.09,34.657) v1(46.09,39.43)
VUSB: C16.1 U2.9 | length 4.3
  Top Layer w0.254: C16.1@36.175,23.67 36.215,23.67 36.46,23.67 36.96,23.17 U2.9@39.71,23.17 ; C16.1@36.215,23.622 cw(c36.215,22.915) 36.715,23.415
pads on no net: "TF Card.1" "TF Card.2" "TF Card.8" AUDIO.5 AUDIO.6 IOH.3 IOH.10 POWER.1 POWER.3 TYPE-C.A8 TYPE-C.B8 U1.4 U1.5

## Polygon pours and split planes (outlines as drawn)
AGND on Top Layer "GND-No Net" (solid, remove dead copper, pour order 1000): 43.39,43.02 46.49,46.12 67.52,46.12 73.24,51.84 89.97,51.84 89.97,34.23 89.99,34.21 48.54,34.21 48.13,33.8 48.13,28.16 46.81,26.84 42.01,26.84 41.68,27.17 41.68,29.86 41.42,30.12 41.42,31.56 41.7,31.84 42.75,31.84 43.4,32.49 43.4,43.01 43.39,43.02
GND on Top Layer "GND-No Net" (solid, remove dead copper, pour order 1001): 86.98,0.02 87.508,0.02 ccw(c87.508,2.56) 89.304,0.764 89.45,0.91 ccw(c88.146,2.214) 89.99,2.214 89.99,2.75 89.99,57.498 ccw(c87.45,57.498) 89.246,59.294 89.05,59.49 ccw(c87.843,58.283) 87.843,59.99 86.67,59.99 2.452,59.99 ccw(c2.452,57.45) 0.656,59.246 0.63,59.22 ccw(c2.223,57.627) -0.03,57.627 -0.03,56.15 -0.03,2.522 ccw(c2.51,2.522) 0.714,0.726 0.92,0.52 ccw(c2.175,1.775) 2.175,0 3.77,0 86.932,0 ccw(c86.932,0.068) 86.98,0.02
AGND on Bottom Layer "GND-No Net" (solid, remove dead copper, pour order 1002): 43.41,43.05 46.47,46.11 67.51,46.11 73.18,51.78 89.95,51.78 89.95,34.23 89.97,34.21 48.46,34.21 48.1,33.85 48.1,28.14 46.87,26.91 46.8,26.84 43.17,26.84 42.1,26.84 41.89,27.05 41.89,29.69 41.48,30.1 41.48,31.81 41.68,32.01 42.97,32.01 43.37,32.41 43.37,43.01 43.41,43.05
GND on Bottom Layer "GND-No Net" (solid, remove dead copper, pour order 1003): 0,2.36 ccw(c2.197,2.36) 0.643,0.807 0.83,0.62 ccw(c2.327,2.117) 2.327,0 2.94,0 87.634,0 ccw(c87.634,2.356) 89.3,0.69 ccw(c87.61,2.38) 90,2.38 90,2.57 90,57.508 ccw(c87.46,57.508) 89.256,59.304 89.12,59.44 ccw(c87.768,58.088) 87.768,60 85.23,60 2.452,60 ccw(c2.452,57.46) 0.656,59.256 0.62,59.22 ccw(c2.117,57.723) 0,57.723 0,2.36
GND on POWER "GND-No Net" (solid, remove dead copper, pour order 1005): 0,2.36 ccw(c2.294,2.36) 0.672,0.738 0.71,0.7 ccw(c2.4,2.39) 2.4,0 2.57,0 87.498,0 ccw(c87.498,2.54) 89.294,0.744 89.41,0.86 ccw(c87.986,2.284) 90,2.284 90,2.56 90,57.568 ccw(c87.678,57.568) 89.32,59.21 89.274,59.256 ccw(c87.478,57.46) 87.478,60 86.63,60 2.43,60 ccw(c2.43,57.61) 0.74,59.3 ccw(c2.527,57.513) 0,57.513 0,2.36
AGND on GND "GND-No Net" (solid, remove dead copper, pour order 1006): 43.41,33.44 43.41,32.45 43.04,32.08 42.78,31.82 41.92,31.82 41.71,31.82 41.49,31.6 41.49,29.89 41.9,29.48 41.94,29.44 41.94,27.21 41.94,26.95 42.05,26.84 46.79,26.84 47.19,27.24 48.08,28.13 48.08,33.55 48.08,33.82 48.5,34.24 90.01,34.24 90.01,51.78 73.22,51.78 69.29,47.85 67.54,46.1 46.46,46.1 43.41,43.05 43.41,33.44
GND on GND "GND-No Net" (solid, remove dead copper, pour order 1007): 2.57,0 2.482,0 cw(c2.482,2.492) 0.72,0.73 cw(c2.458,2.468) 0,2.468 0,3.05 0,57.522 cw(c2.458,57.522) 0.72,59.26 cw(c2.507,57.473) 2.507,60 5.4,60 87.473,60 cw(c87.473,57.473) 89.26,59.26 cw(c87.473,57.473) 90,57.473 90,55.24 90,2.402 cw(c87.678,2.402) 89.32,0.76 89.196,0.636 cw(c87.66,2.173) 87.66,0 2.57,0

## Keep-outs
Keep-Out Layer:
  circle w0.254: c86.2,37.99 r1.6
  circle w0.254: c18.5,2.47 r1.6
  circle w0.254: c35.4,53.23 r1.6
  circle w0.254: c86.2,10.05 r1.6
  circle w0.254: c22.35,47.08 r1.6
  circle w0.254: c19.64,17.773 r1.6
  pour cut-out: 21.37,-0.29 21.37,5.47 45.05,5.47 45.05,-0.29
  pour cut-out: 46.88,26.85 48.11,28.08 48.11,33.79 48.5,34.18 90,34.18 90,34.08 48.55,34.08 48.21,33.74 48.21,28.04 46.89,26.72 41.98,26.72 41.77,26.93 41.77,29.4 41.44,29.73 41.44,31.83 41.59,31.98 42.67,31.98 43.27,32.58 43.27,43.06 46.46,46.25 67.4,46.25 73.09,51.94 90,51.94 90,51.8 73.18,51.8 67.51,46.13 46.48,46.13 43.38,43.03 43.38,32.47 42.8,31.89 41.71,31.89 41.61,31.79 41.61,29.75 41.89,29.47 41.89,26.98 42.02,26.85
  lines w0.205: 2.359,60.001 ccw(c2.464,57.536) 0,57.668 0,2.36 ccw(c2.465,2.465) 2.57,0 87.66,0 ccw(c87.536,2.464) 90,2.349 ; 2.37,60 87.51,60 ; 87.43,60 cw(c87.535,57.535) 90.002,57.5 ; 90,2.36 90,57.5

## Other copper
Top Layer:
  rectangle net VIN: 20.563,35.316 24.353,36.326
  rectangle net +5V: 8.333,50.628 9.468,51.23
  rectangle net +5V: 8.033,45.731 9.37,46.328
  rectangle net GND: 87.195,51.37 87.665,52.468
  rectangle net GND: 42.779,32.828 44.032,33.358
  region net +5V: 8.156,43.003 7.306,43.003 7.169,42.866 7.169,42.342 6.143,41.316 6.143,38.419 6.445,38.117 6.438,38.11 6.438,35.937 6.894,35.481 10.687,35.481 10.785,35.579 10.785,37.192 12.52,38.927 12.52,43.139 13.353,43.972 13.391,43.972 13.391,44.539 12.73,45.2 11.368,43.838 11.368,39.634 10.061,38.327 9.099,38.327 8.843,38.583 8.843,41.075 10.14,42.372 10.14,46.052 9.864,46.328 8.963,46.328 8.774,46.139 8.526,46.139 8.358,45.971 8.389,45.971 8.773,45.587 8.773,43.62
  region net NetD4_2: 14.18,34.89 14.8,34.27 18.69,34.27 19.12,34.7 19.12,35.82 18.96,35.98 15.97,35.98 15.54,36.41 15.54,37.52 14.56,37.52 14.18,37.14
  region net LX: 35.15,19.76 35.29,19.9 37.18,19.9 38.97,21.69 40.34,21.69 37.89,19.24 37.89,18.64 37.62,18.37 35.3,18.37 35.15,18.52
  region net VDDBKO: 35.16,16.78 35.72,17.34 39.83,17.34 41.51,19.02 41.51,18.65 41.609,18.551 41.609,17.309 40.03,15.73 35.33,15.73 35.16,15.9
  pour cut-out: 45.108,17.898 44.79,17.58 44.8,17.57 44.8,13.62 36.08,4.9 36.08,4.75 39.31,4.75 39.57,5.01 39.57,5.78 46.41,12.62 46.41,17.88 46.01,18.28 46.01,21.198 45.794,21.414 45.226,21.414 45.108,21.296
POWER:
  rectangle net +5V: 8.577,45.717 9.402,51.223
  rectangle net VIN: 23.189,35.255 24.409,36.435

## Silkscreen, mask and mechanical layers (free items; w line width, h text height)
Top Overlay:
  lines w0.4: 80.676,51.313 81.571,51.313 81.124,50.865 80.676,51.313 ; 83.296,50.868 84.191,50.868 83.744,51.315 83.296,50.868
  text "PWM_PA4" at 56.481,59.822 h0.75 r270
  text "PWM_PA6" at 58.922,59.802 h0.75 r270
  text "PWM_PB0" at 75.698,59.795 h0.75 r270
  text "PWM_PA1" at 54.032,59.722 h0.75 r270
  text "PWM_PE0" at 67.9,59.712 h0.75 r270
  text "PWM_PE1" at 70.491,59.709 h0.75 r270
  text "SDA_PE2" at 41.121,59.535 h0.75 r270
  text "TX_PA4" at 80.652,59.467 h0.75 r270
  text "RX_PA3" at 83.355,59.449 h0.75 r270
  text "SCL_PE3" at 38.538,59.375 h0.75 r270
  text "IO_PA5" at 72.923,59.078 h0.75 r270
  text "IO_PF0" at 65.381,59.009 h0.75 r270
  text "IO_PA0" at 48.652,58.884 h0.75 r270
  text "IO_PA0" at 51.277,58.884 h0.75 r270
  text "IO_PF1" at 78.131,58.819 h0.75 r270
  text "Upd-PA7" at 27.232,58.709 h0.8
  text "GND" at 46.108,57.762 h0.75 r270
  text "NC" at 43.744,57.401 h0.75 r270
  text "NC" at 61.353,57.401 h0.75 r270
  text "1-WIRE" at 22.428,56.221 h0.8
  text "RX-PA6" at 32.569,55.233 h0.8
  text "VBAT'" at 22.06,48.966 h0.8
  text "VBAT" at 29.669,48.966 h0.8
  text "VIN" at 26.457,48.943 h0.8
  text "GND" at 19.302,48.929 h0.8
  text "C-Test" at 28.294,47.84 h0.8
  text "AB32VG1" at 48.904,38.978 h1.5
  text "PF1" at 35.2,38.34 h0.8
  text "2021.05 V2.0" at 49.346,37.51 h1
  text "RESET" at 26.321,37.092 h0.8
  text "PF0" at 35.2,35.8 h0.8
  text "GND" at 57.136,34.641 h0.75
  text "5V" at 60.367,34.652 h0.75
  text "3V3" at 54.248,34.626 h0.75
  text "MICR" at 34.59,33.23 h0.8
  text "IRDA-PE6" at 17.994,29.987 h0.8
  text "LED-PE1" at 18.11,27.513 h0.8
  text "LED-PA1" at 18.093,25.035 h0.8
  text "PB0-SD_CMD" at 56.738,24.468 h0.8
  text "LED-PE4" at 18.109,22.41 h0.8
  text "PB1-SD_CLK" at 56.81,22.34 h0.8
  text "PB2-SD_DAT" at 56.734,17.28 h0.8
  text "GND" at 47.907,17.171 h0.75
  text "PB4-DM" at 53.164,16.246 h0.8 r270
  text "PB3-DP" at 59.673,16.184 h0.8 r270
  text "PE5-SD_DET" at 63.223,14.468 h0.8
  text "A2_WKO" at 75.595,10.935 h0.75 r270
  text "A4_PE6" at 80.739,10.659 h0.75 r270
  text "A0_PB2" at 70.47,10.639 h0.75 r270
  text "A3_PE5" at 78.158,10.607 h0.75 r270
  text "A5_PE7" at 83.332,10.6 h0.75 r270
  text "A1_PB1" at 73.033,10.3 h0.75 r270
  text "VIN_5V" at 64.272,1.981 h0.75
  text "NC" at 47.019,1.925 h0.75
  text "IOREF" at 49.02,1.925 h0.75
  text "NC" at 52.765,1.925 h0.75
  text "3V3" at 54.695,1.925 h0.75
  text "5V" at 57.656,1.925 h0.75
  text "GND" at 60.923,1.925 h0.75
Top Solder:
  region: 37.256,7.344 38.387,8.475 35.906,10.956 34.774,9.825